# Altium PCB cube_PCB.PcbDoc
Units mil, origin at the board's own origin, x right, y up, seen from the top; angles counter-clockwise.
Board outline 1653.54 x 1653.54 mil, 2 copper layers (Top Layer, Bottom Layer); 9 components, 0 nets, 18 pads, 0 vias.
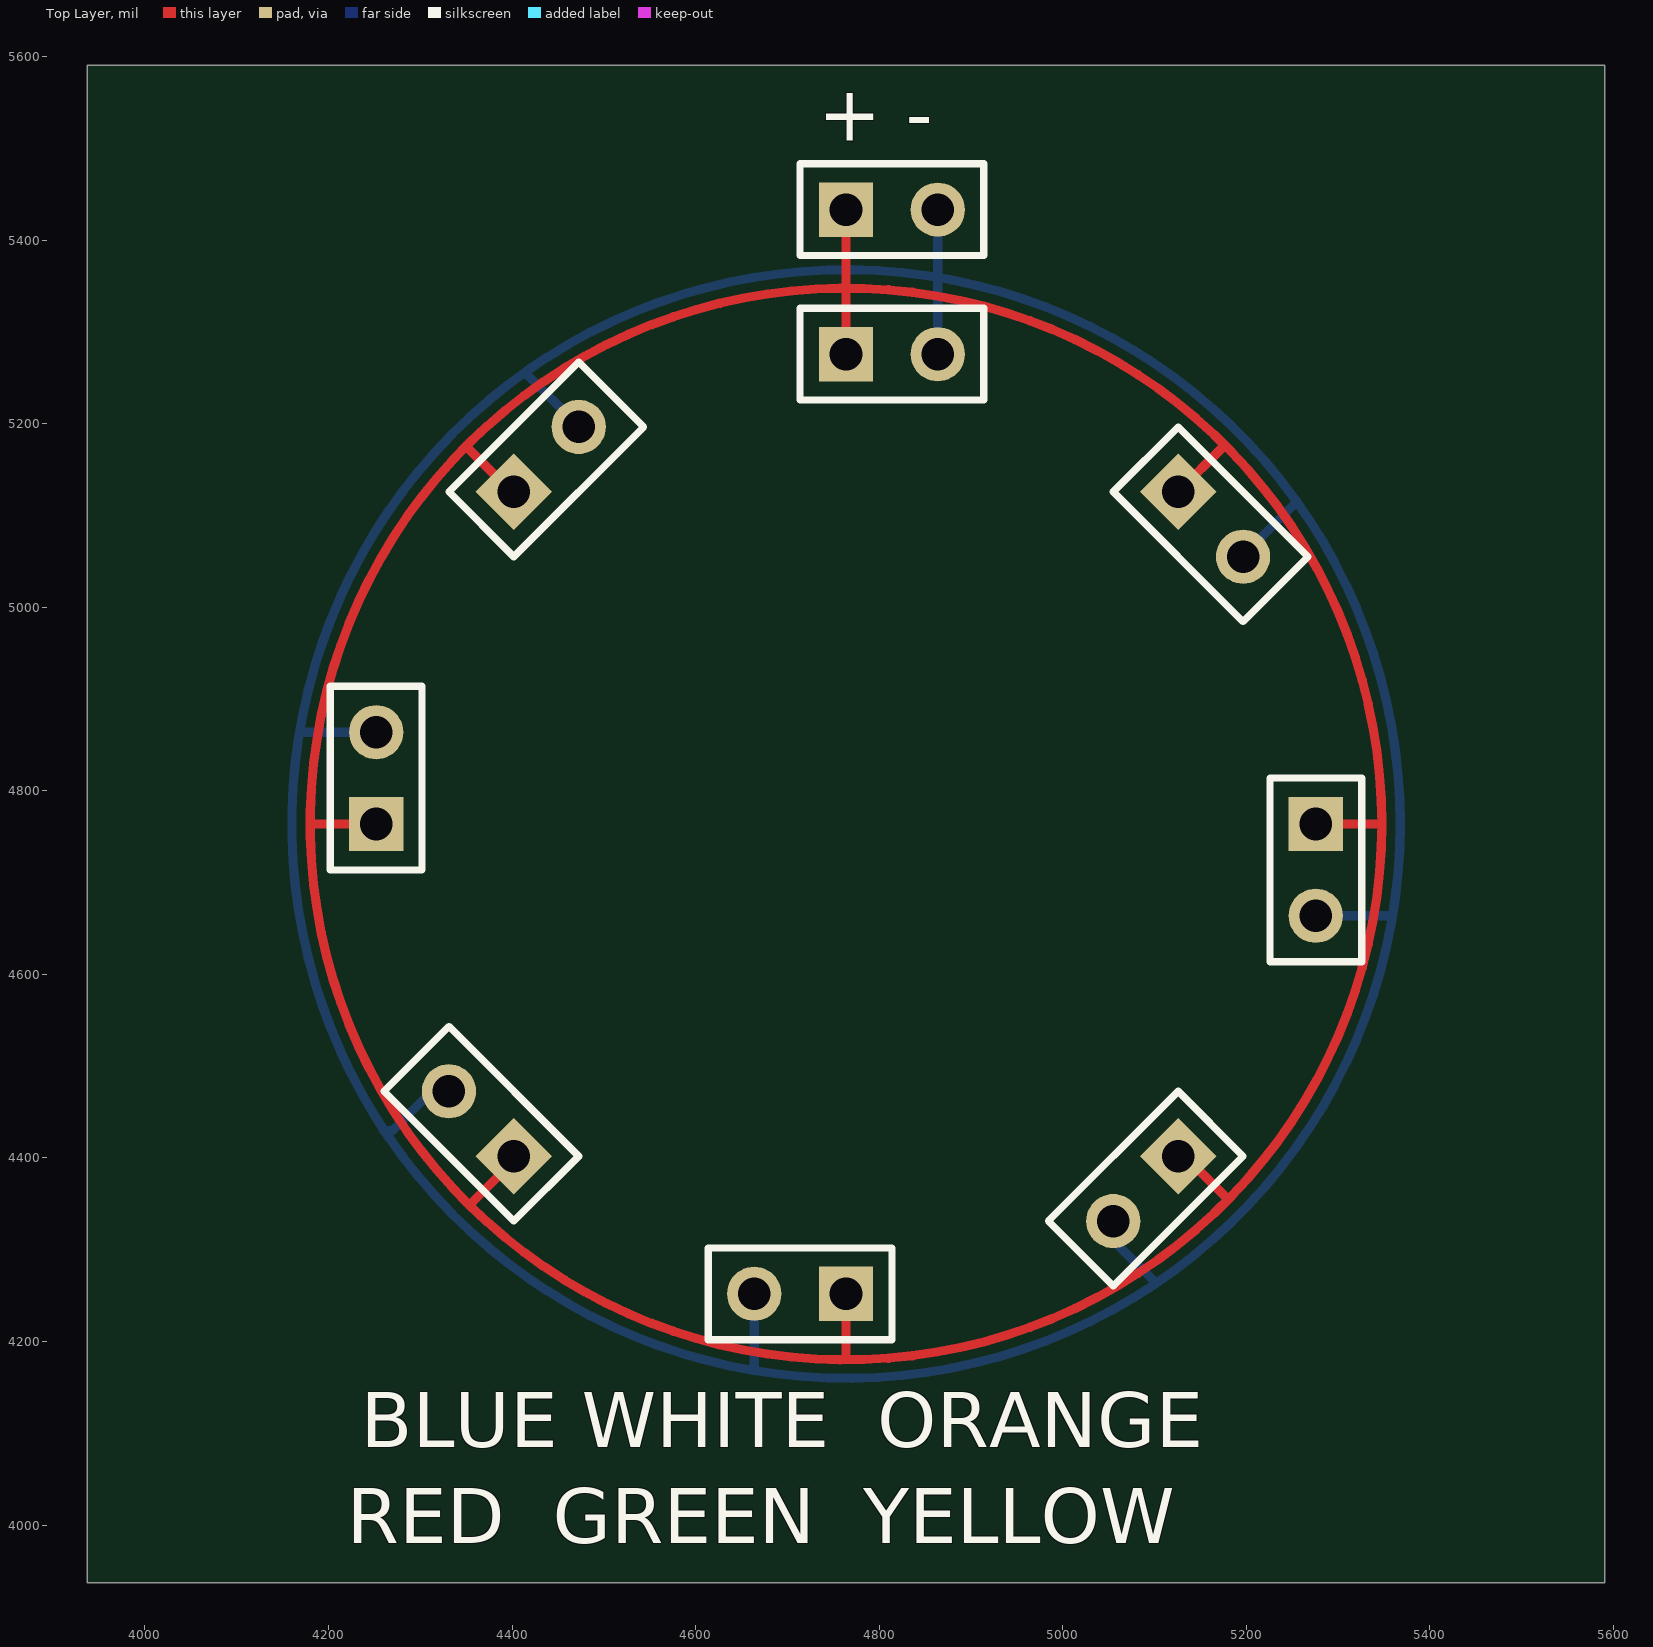
[diagram p0: Top Layer view]
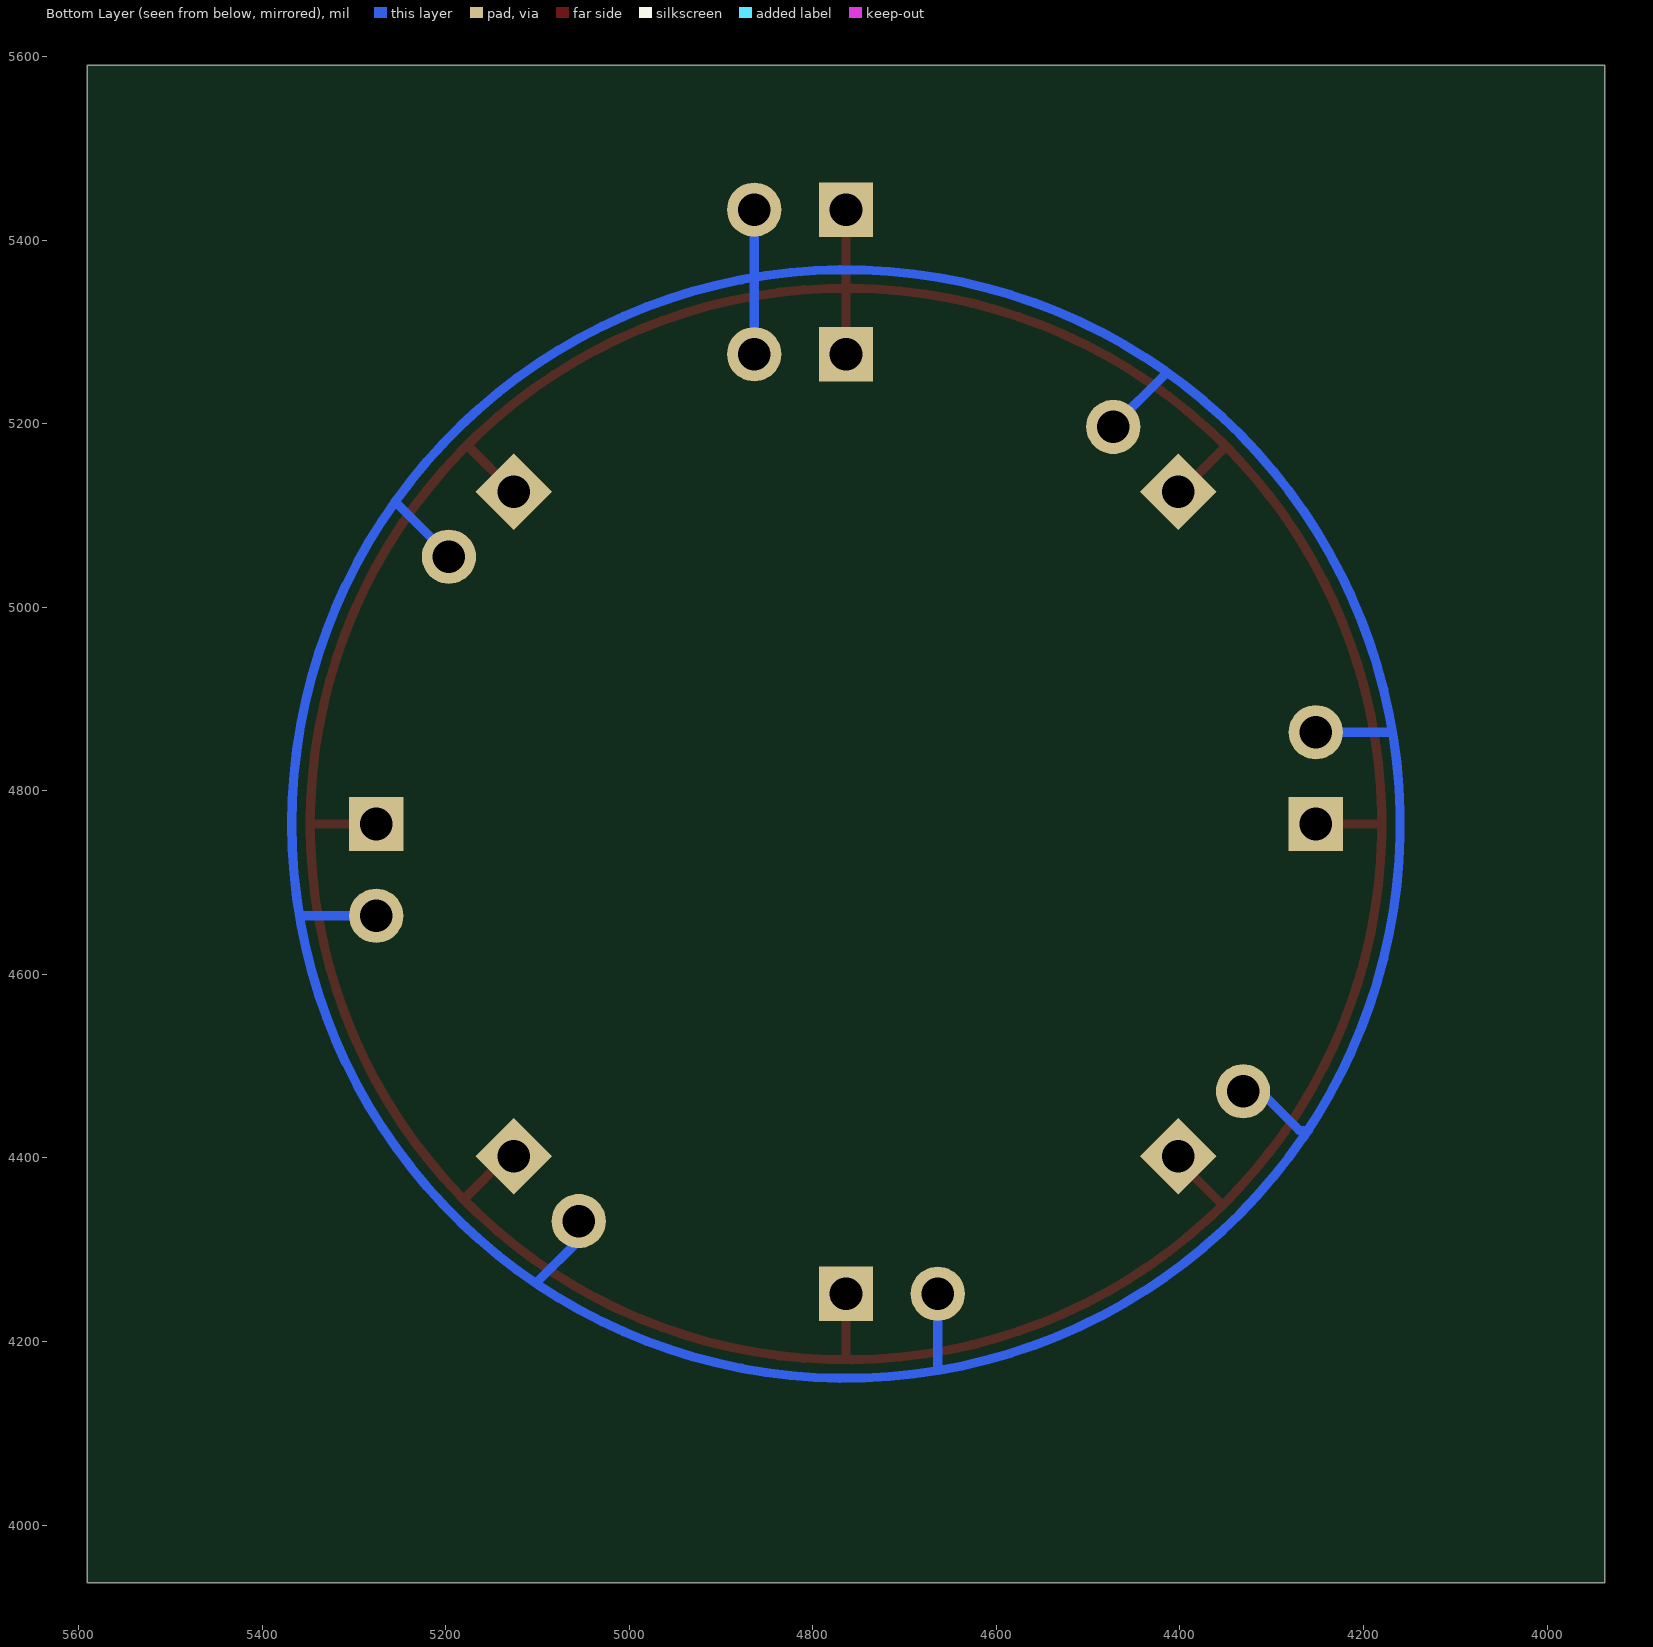
[diagram p1: Bottom Layer view, seen from below]

## Layer stack, top to bottom
Top Solder: solder mask 0.4, Solder Resist, Dk 3.5
Top Layer: signal copper 1.4
Dielectric 1: dielectric 12.6, FR-4, Dk 4.8
Bottom Layer: signal copper 1.4
Bottom Solder: solder mask 0.4, Solder Resist, Dk 3.5

## Board outline
3937.01,3937.01 3937.01,5590.55 5590.55,5590.55 5590.55,3937.01

## Design rules (kind name [scope] priority, off if disabled: settings)
Clearance [All] p1: gap=10 ignorepadtopadclearanceinfootprint=FALSE except(0: Arc-Hole Track-Hole SMDPad-Hole THPad-Hole Via-Hole Fill-Hole Poly-Hole Region-Hole Text-Hole)
PolygonConnect [All] p1: connectstyle=Relief reliefconductorwidth=10 reliefentries=4 polygonreliefangle="90 Angle" airgapwidth=10
RoutingVias [All] p1: holewidth=28 width=50 viastyle="Through Hole" minholewidth=28 minwidth=50 maxholewidth=28 maxwidth=50
SolderMaskExpansion [All] p1: expansion=4
Width [All] p1: maxlimit=10 minlimit=10 preferedwidth=10
30 further rules are at their usual default settings.

## Components (designator, comment, footprint, x,y, rotation, side; value= is the part's Value field where it differs from the comment)
"+ -" "Header 2" HDR1X2 4763.78,5433.07 r0 top (schematic designator POWER)
LED0 "Header 2" HDR1X2 4763.78,5275.59 r0 top
LED1 "Header 2" HDR1X2 5125.68,5125.68 r315 top
LED2 "Header 2" HDR1X2 5275.59,4763.78 r270 top
LED3 "Header 2" HDR1X2 4763.78,4251.97 r180 top
LED4 "Header 2" HDR1X2 4401.87,4401.87 r135 top
LED5 "Header 2" HDR1X2 5125.68,4401.87 r225 top
LED6 "Header 2" HDR1X2 4251.97,4763.78 r90 top
LED6 "Header 2" HDR1X2 4401.87,5125.68 r45 top

## Footprints (in the part's own frame and the unit in brackets; to place one, negate y for a bottom-side part, rotate by r counter-clockwise, add the part's x,y. Pads: shape width x height; smd on the part's side, far side on the other; paste and mask are expansions set on the pad)
HDR1X2 [mm] "Connector; Header; 2 Position"
  rect 1.5x1.5 hole 0.9: 1(0,0)
  round 1.5 hole 0.9: 2(2.54,0)
  silkscreen extent -1.27,-1.27 3.81,1.27

## Part data
"+ -" LED0 LED1 LED2 LED3 LED4 LED5 LED6 LED6: "Header, 2-Pin", LatestRevisionDate=17-Jul-2002, LatestRevisionNote="Re-released for DXP Platform.", Publisher="Altium Limited"

## Nets (pads, with @x,y where several pads share a name; then routed paths per layer and width w, separated by ;. In a path a pad name is that pad's centre, name@x,y a point inside that pad or via, vN(x,y) a via of type N, cw(c..) or ccw(c..) an arc to the next point about the centre after c; other vN are vias at no path point)
pads on no net: "+ -.1" "+ -.2" LED0.1 LED0.2 LED1.1 LED1.2 LED2.1 LED2.2 LED3.1 LED3.2 LED4.1 LED4.2 LED5.1 LED5.2 LED6.1 LED6.2
copper on no net: | length 8901.8
  Top Layer w10: 4183.78,4763.78 4251.97,4763.78 ; 4350,5175 4399.32,5125.68 4401.87,5125.68 ; 4355,4350 4401.87,4396.87 4401.87,4401.87 ; 4763.78,4181.22 4763.78,4251.97 ; 4763.78,5275.59 4763.78,5351.22 4763.78,5433.07 ; 5125.68,4401.87 5133.13,4401.87 ; 5125.68,5125.68 5175,5175 ; 5129.41,4401.87 5133.13,4401.87 ; 5180,4355 5133.13,4401.87 ; 5275.59,4763.78 5347.56,4763.78 ; 5347.56,4763.78 ccw(c4763.78,4763.78) 5347.56,4763.78
  Bottom Layer w10: 4171.22,4863.78 4251.97,4863.78 4236.22,4863.78 ; 4260,4430 4270,4430 4312.58,4472.58 4331.16,4472.58 ; 4415,5255 4472.58,5197.42 4472.58,5196.4 ; 4458.6,5196.4 4472.58,5196.4 ; 4472.58,5207.42 4472.58,5196.4 ; 4663.78,4173.78 4663.78,4251.97 ; 4863.78,5275.59 4863.78,5358.78 4863.78,5433.07 ; 5054.97,4331.16 5054.97,4310.03 5100,4265 ; 5196.4,5054.97 5196.4,5056.4 5255,5115 ; 5275.59,4663.78 5358.78,4663.78 ; 5367.59,4763.78 ccw(c4763.78,4763.78) 5367.59,4763.78

## Silkscreen, mask and mechanical layers (free items; w line width, h text height)
Top Overlay:
  text "BLUE WHITE  ORANGE" at 4235,4085 h60
  text "RED  GREEN  YELLOW" at 4220,3980 h60
Mechanical 1:
  circle w10: c4153.54,5374.02 r59.06
  circle w10: c4153.54,4153.54 r59.06
  circle w10: c5374.02,4153.54 r59.06
  circle w10: c5374.02,5374.02 r59.06
  circle w10: c4763.78,4763.78 r440.94
  lines w10: 3937.01,3937.01 5590.55,3937.01 5590.55,5590.55 3937.01,5590.55 3937.01,3937.01